# Altium PCB IR_MODULE.PcbDoc
Units mm, origin at the board's own origin, x right, y up, seen from the top; angles counter-clockwise.
Board outline 56.9 x 19.94 mm, 2 copper layers (Top Layer, Bottom Layer); 9 components, 7 nets, 30 pads, 0 vias.
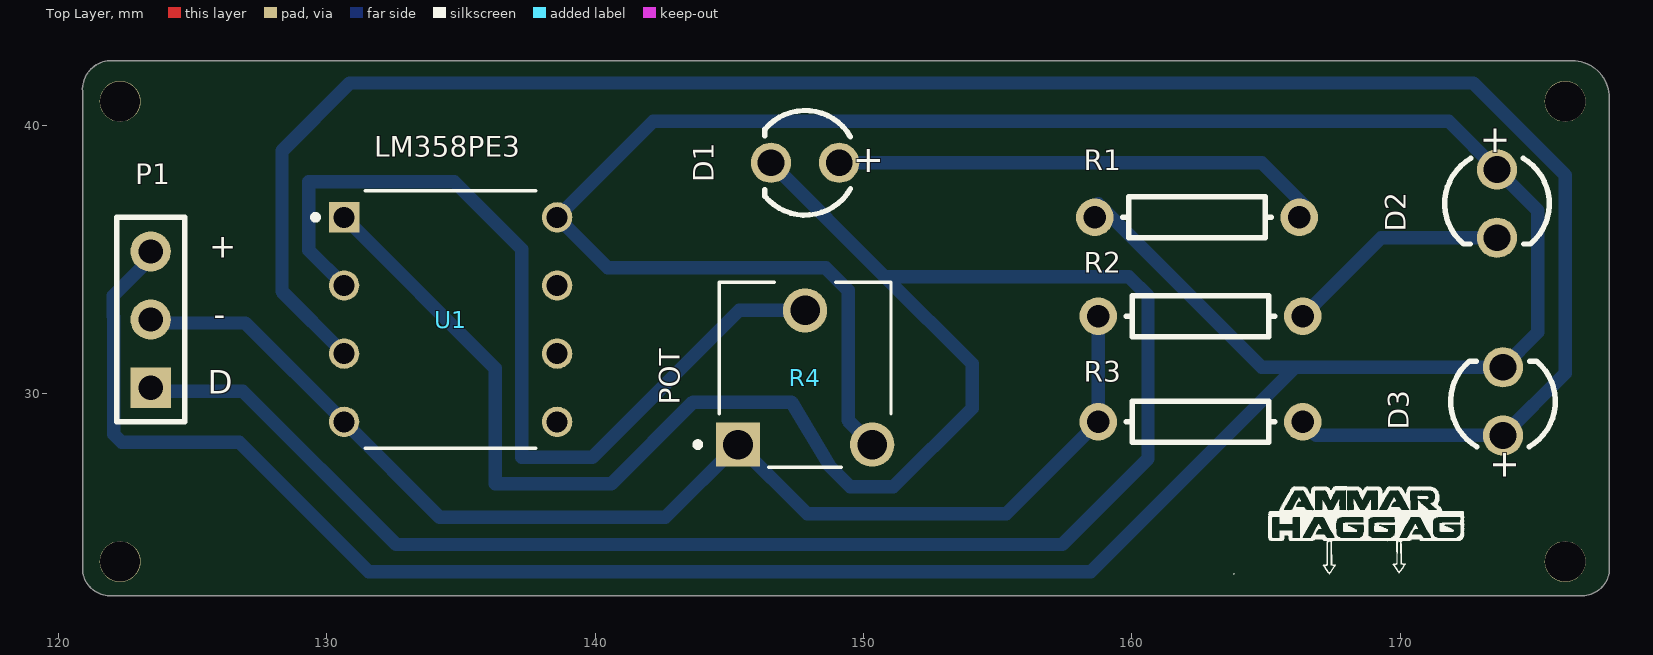
[diagram p0: Top Layer view]
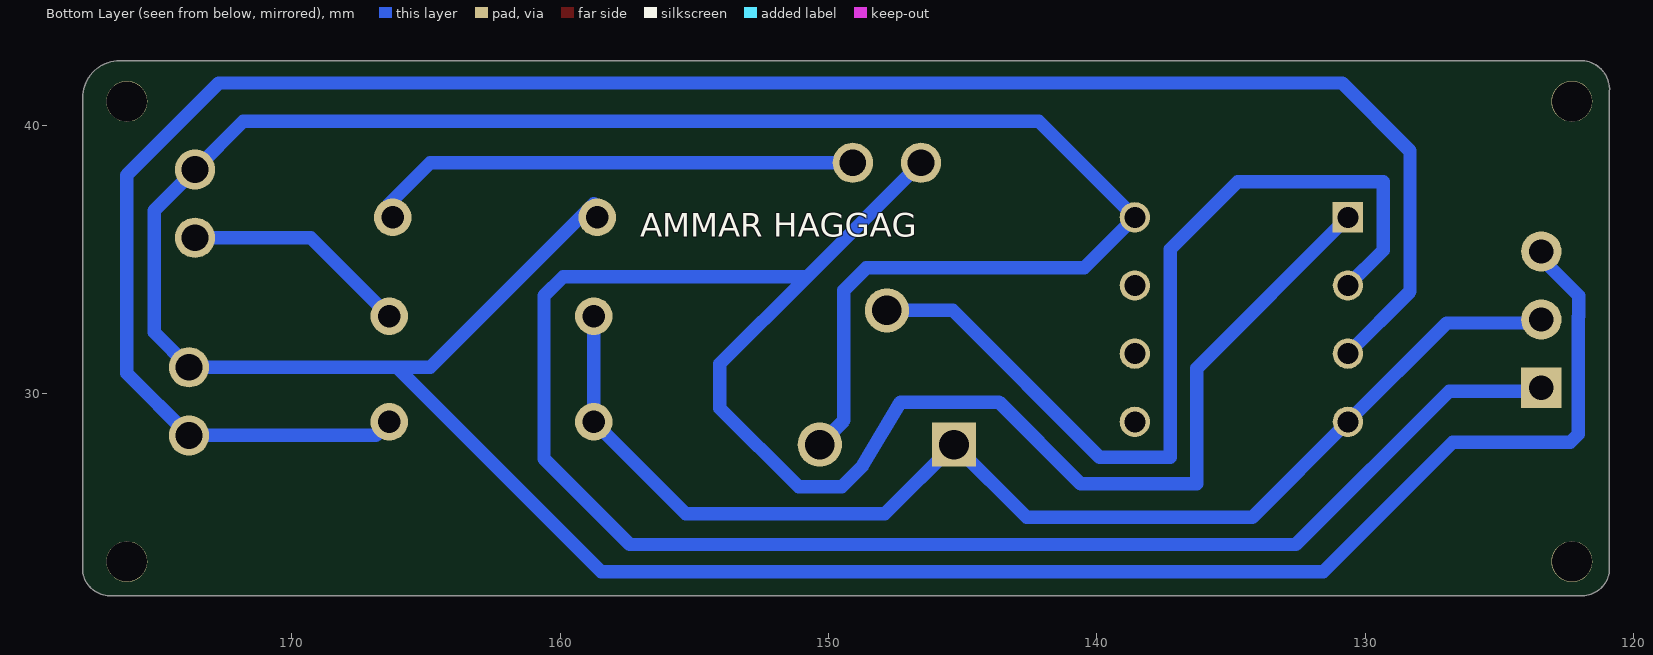
[diagram p1: Bottom Layer view, seen from below]
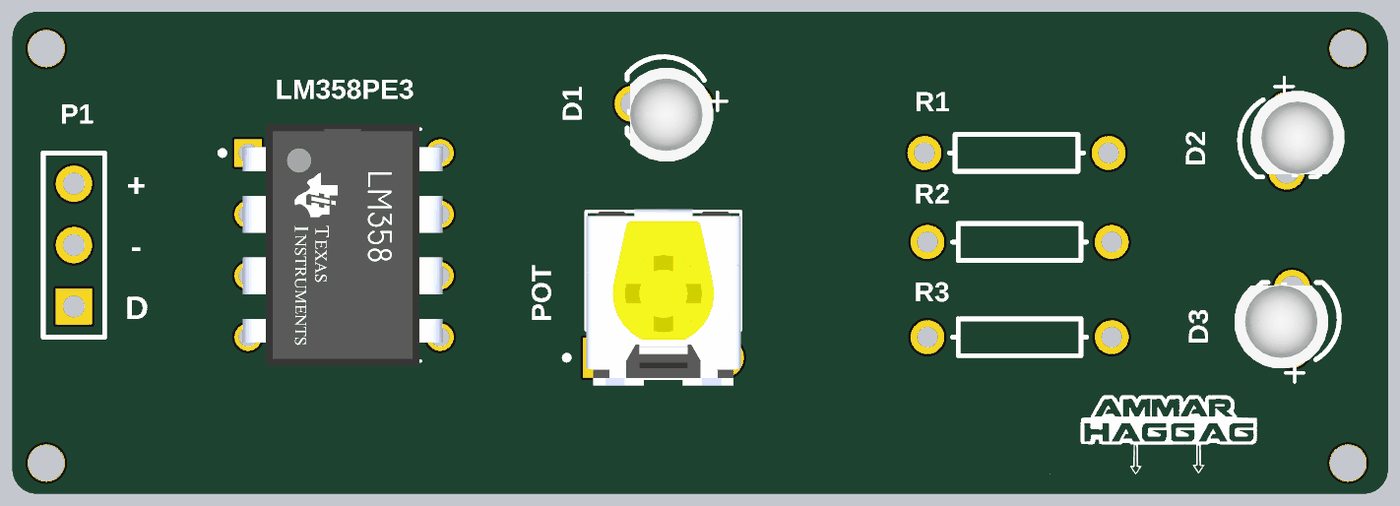
[diagram p2: 3D render of the assembled board from above, using the file's embedded part models]

## Layer stack, top to bottom
Top Solder: solder mask 0.0102, Solder Resist, Dk 3.5
Top Layer: signal copper 0.0356
Dielectric 1: dielectric 0.32, FR-4, Dk 4.8
Bottom Layer: signal copper 0.0356
Bottom Solder: solder mask 0.0102, Solder Resist, Dk 3.5

## Board outline
120.904,23.495 120.904,41.275 cw(c121.983,41.338) 121.92,42.418 176.403,42.418 cw(c176.403,41.021) 177.8,41.021 177.8,23.495 cw(c176.784,23.495) 176.784,22.479 121.92,22.479 cw(c121.92,23.495)

## Design rules (kind name [scope] priority, off if disabled: settings)
Clearance polygan [InNamedPolygon('NONET_L01_P000')] p1: gap=0.5 ignorepadtopadclearanceinfootprint=FALSE
Clearance [All] p2: gap=0.5 ignorepadtopadclearanceinfootprint=FALSE
PolygonConnect [All] p1: connectstyle=Relief reliefconductorwidth=0.254 reliefentries=4 polygonreliefangle="90 Angle" airgapwidth=0.254
RoutingLayers [All] p1: top layer_v5=FALSE bottom layer_v5=TRUE
RoutingVias [All] p1: holewidth=0.711 width=1.27 viastyle="Through Hole" minholewidth=0.711 minwidth=1.27 maxholewidth=0.711 maxwidth=1.27
SolderMaskExpansion [All] p1: expansion=0.102 istentingtop=FALSE
UnRoutedNet [All] p1: checkbadconnections=TRUE
Width [All] p1: maxlimit=0.5 minlimit=0.5 preferedwidth=0.5
28 further rules are at their usual default settings.

## Components (designator, comment, footprint, x,y, rotation, side; value= is the part's Value field where it differs from the comment)
D1 "Infrared, 1.5V, 35°" WL-TIRW_D3.9H5.3 147.828,38.608 r180 top
D2 "Infrared, 1.5V, 35°" WL-TIRW_D3.9H5.3 173.609,37.084 r270 top
D3 "Infrared, 1.5V, 35°" WL-TIRW_D3.9H5.3 173.833,29.718 r90 top
P1 "Header 3" HDR1X3 123.444,30.226 r90 top
R1 "100R" AXIAL-0.3 162.433,36.576 r180 top value=330R
R2 "Res1" AXIAL-0.3 162.56,32.893 r0 top value=100R
R3 "Res1" AXIAL-0.3 162.56,28.956 r0 top value=10K
R4 "POT" TRIM_EVN-D8AA03B55 147.828,30.607 r0 top
U1 "LM358PE3" DIP794W45P254L959H508Q8 134.62,32.766 r0 top

## Footprints (in the part's own frame and the unit in brackets; to place one, negate y for a bottom-side part, rotate by r counter-clockwise, add the part's x,y. Pads: shape width x height; smd on the part's side, far side on the other; paste and mask are expansions set on the pad)
AXIAL-0.3 [mm] "Axial Device, Thru-Hole; 2 Leads; 0.3 in Pin Spacing"
  round 1.4 hole 0.85: 1(-3.81,0) 2(3.81,0)
  silkscreen extent -2.77,-0.76 2.77,0.76
DIP794W45P254L959H508Q8 [mm]
  rect 1.13x1.13 hole 0.78: 1(-3.97,3.81)
  round 1.13 hole 0.78: 2(-3.97,1.27) 3(-3.97,-1.27) 4(-3.97,-3.81) 5(3.97,-3.81) 6(3.97,-1.27) 7(3.97,1.27) 8(3.97,3.81)
  silkscreen extent -5.13,-4.79 3.17,4.79, body extent -4.19,-5 4.07,5, height 5.13
HDR1X3 [mm] "Connector; Header; 3 Position"
  rect 1.5x1.5 hole 0.9: 1(0,0)
  round 1.5 hole 0.9: 2(2.54,0) 3(5.08,0)
  silkscreen extent -1.27,-1.27 6.35,1.27
TRIM_EVN-D8AA03B55 [mm]
  rect 1.65x1.65 / inner round 1.65 / far side rect 1.65x1.65 hole 1.1: 1(-2.5,-2.5)
  round 1.65 hole 1.1: 2(0,2.5) 3(2.5,-2.5)
  silkscreen extent -4.1,-3.35 3.2,3.55, body extent -3.2,-3.65 3.2,3.65, height 6.35
WL-TIRW_D3.9H5.3 [mm] "THT Infrared Round Waterclear, body diameter 3.9mm"
  round 1.5 hole 1: 1(1.27,0) 2(-1.27,0)
  silkscreen extent -1.69,-1.95 1.5,1.95, body extent -2.07,-1.5 1.5,2.4, height 5.33

## Part data
D1 D2 D3: library part 15400385A3590, "WL-TIRW THT Infrared Round Waterclear, D3.9 x H5.3mm, 60mW/sr, Infrared, 1.5V, 35°", Emitting Color=Infrared, Forward Voltage=1.5V, Manufacturer="Wurth Elektronik", Operating Temperature Max=85°C, Operating Temperature Min=-40°C, Category="Infrared LEDs", Centroid Wavelength=845nm, Chip Technology=AlGaAs, ComponentLink1Description="Website Link", ComponentLink1URL=https://www.we-online.com/redexpert/article/15400385A3590?ad, ComponentLink2Description="Datasheet Link", ComponentLink2URL=https://www.we-online.com/redexpert/spec/15400385A3590?ad, Diameter=3.9mm, Height=5.3mm, Manufacturer Part Number=15400385A3590, Match Code=WL-TIRW, Mount="Through Hole", Packaging=Bulk, Peak Wavelength=850nm, Radiant Intensity=60mW/sr, Viewing Angle=35°
P1: "Header, 3-Pin", LatestRevisionDate=17-Jul-2002, LatestRevisionNote="Re-released for DXP Platform.", Publisher="Altium Limited"
R1: library part Res1, "Resistor", LatestRevisionDate=17-Jul-2002, LatestRevisionNote="Re-released for DXP Platform.", PackageDescription="Axial Device, Thru-Hole; 2 Leads; 0.3 in Pin Spacing", PackageReference=AXIAL-0.3, Published=8-Jun-2000, Publisher="Altium Limited"
R2 R3: "Resistor", LatestRevisionDate=17-Jul-2002, LatestRevisionNote="Re-released for DXP Platform.", PackageDescription="Axial Device, Thru-Hole; 2 Leads; 0.3 in Pin Spacing", PackageReference=AXIAL-0.3, Published=8-Jun-2000, Publisher="Altium Limited"
R4: library part EVN-D8AA03B55, "500 kOhms 0.1W, 1/10W PC Pins Through Hole Trimmer Potentiometer Carbon 1.0 Turn Top Adjustment", Package="PQFP-44 Panasonic", Check_prices=https://www.snapeda.com/parts/EVN-D8AA03B55/Panasonic+Electronic+Components/view-part/?ref=eda, MF="Panasonic Electronic", MP=EVN-D8AA03B55, SnapEDA_Link=https://www.snapeda.com/parts/EVN-D8AA03B55/Panasonic+Electronic+Components/view-part/?ref=snap
U1: Package=None, Availability=Unavailable, MP=LM358PE3, Price=None

## Free pads (board coordinates)
  round 1.524 hole 1.5: 1(122.301,40.894) 2(122.301,23.749) 3(176.149,23.749) 4(176.149,40.894)

## Nets (pads, with @x,y where several pads share a name; then routed paths per layer and width w, separated by ;. In a path a pad name is that pad's centre, name@x,y a point inside that pad or via, vN(x,y) a via of type N, cw(c..) or ccw(c..) an arc to the next point about the centre after c; other vN are vias at no path point)
+5: D2.2 D3.1 P1.3 R1.2 R4.3 U1.8 | length 138.1
  Bottom Layer w0.5: P1.3@123.571,35.179 122.047,33.655 122.047,32.893 122.071,32.869 122.071,31.16 122.071,28.487 122.364,28.194 126.746,28.194 131.572,23.368 158.471,23.368 166.091,30.988 ; R4.3 149.428,29.007 149.428,33.858 148.59,34.696 140.47,34.696 U1.8 142.171,40.157 171.806,40.157 D2.2 175.133,36.83 175.133,32.288 D3.1 166.091,30.988 ; R1.2@158.75,37.084 164.846,30.988 166.091,30.988
GND: P1.2 R2.1 R3.1 R4.1 U1.4 | length 45.7
  Bottom Layer w0.5: P1.2@123.571,32.639 126.967,32.639 U1.4 134.206,25.4 142.621,25.4 R4.1 147.903,25.532 155.326,25.532 R3.1 R2.1
NetD1_2: D1.2 R1.1 | length 17.9
  Bottom Layer w0.5: D1.2 164.846,38.608 R1.1@166.37,37.084
NetD2_1: D2.1 R2.2 | length 8.4
  Bottom Layer w0.5: R2.2 169.291,35.814 D2.1
NetD3_2: D3.2 R3.2 U1.3 | length 77.1
  Bottom Layer w0.5: U1.3 128.335,33.811 128.335,39.05 130.865,41.58 172.72,41.58 176.149,38.151 176.149,30.764 D3.2 166.878,28.448 R3.2
NetR4_2: R4.2 U1.2 | length 33.9
  Bottom Layer w0.5: U1.2 129.335,35.351 129.335,37.897 134.758,37.897 137.275,35.38 137.275,27.641 139.905,27.641 145.371,33.107 R4.2
out1: D1.1 P1.1 U1.1 | length 103.3
  Bottom Layer w0.5: P1.1@123.571,30.099 126.873,30.099 132.588,24.384 157.404,24.384 160.604,27.584 160.604,33.655 159.893,34.366 150.8,34.366 ; U1.1 136.275,30.951 136.275,26.641 140.6,26.641 143.652,29.693 147.32,29.693 148.742,27.305 149.515,26.532 151.119,26.532 154.051,29.464 154.051,31.115 150.8,34.366 ; D1.1 150.8,34.366
pads on no net: U1.5 U1.6 U1.7

## Silkscreen, mask and mechanical layers (free items; w line width, h text height)
Top Overlay:
  drawing of 3 lines, arcs and shapes, not listed
  text "+" at 125.632,34.776 h1.52
  text "-" at 125.79,32.243 h1.52
  text "D" at 125.566,29.71 h1.52
Bottom Overlay:
  text "AMMAR HAGGAG" at 157.025,35.56 h1.52
Mechanical 1:
  lines w0.254: 151.003,29.718 157.353,29.718 ; 120.904,23.495 ccw(c121.92,23.495) 121.92,22.479 176.784,22.479 ccw(c176.784,23.495) 177.8,23.495 177.8,41.021 ccw(c176.403,41.021) 176.403,42.418 121.92,42.418 ccw(c121.983,41.338) 120.904,41.275 120.904,23.495

## Text inside footprints (layer, text, board x,y; h text height)
D1: Top Overlay "+" at 150.778,39.108 h1.02 r180
D2: Top Overlay "+" at 173.109,40.034 h1.02 r270
D3: Top Overlay "+" at 174.333,26.768 h1.02 r90